# Altium PCB couple4.PcbDoc
Units mil, origin at the board's own origin, x right, y up, seen from the top; angles counter-clockwise.
Board outline 1090 x 970.6 mil, 2 copper layers (Top Layer, Bottom Layer); 10 components, 56 nets, 30 pads, 122 vias.
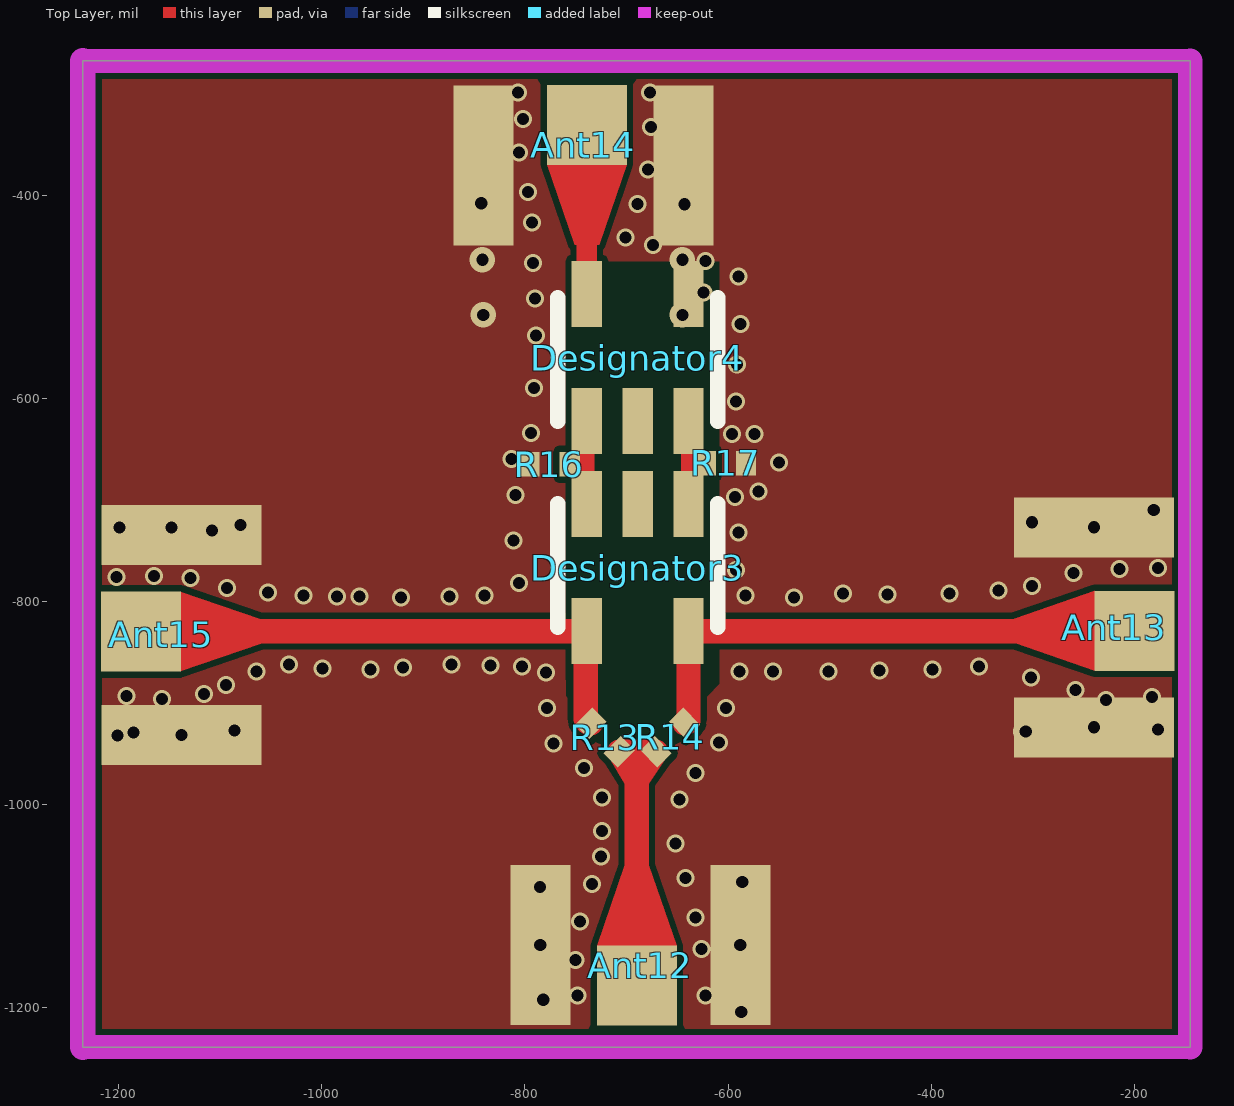
[diagram p0: Top Layer view]
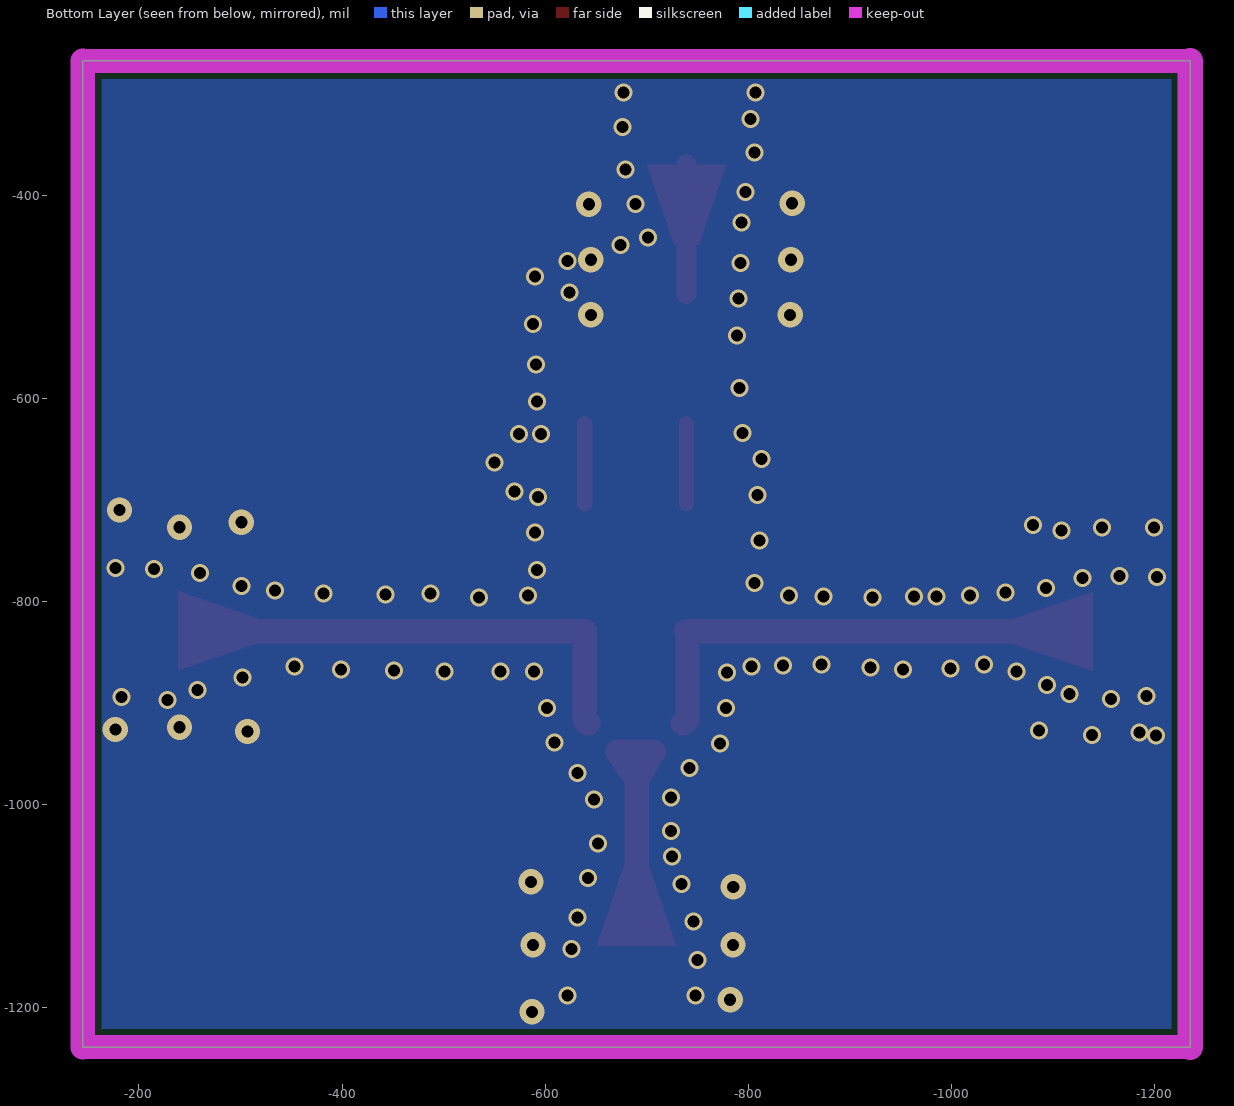
[diagram p1: Bottom Layer view, seen from below]

## Layer stack, top to bottom
Top Solder: solder mask 0.4, Solder Resist, Dk 3.5
Top Layer: signal copper 1.4
Dielectric 1: dielectric 12.6, FR-4, Dk 4.8
Bottom Layer: signal copper 1.4
Bottom Solder: solder mask 0.4, Solder Resist, Dk 3.5

## Board outline
-1235,-1238.6 -1235,-268 -145,-268 -145,-1238.6

## Design rules (kind name [scope] priority, off if disabled: settings)
Clearance [All] p1: gap=6 ignorepadtopadclearanceinfootprint=FALSE
DiffPairsRouting [All] p1: maxlimit=10 minlimit=10 mostfreqgap=10 toplayer_minwidth=15 toplayer_maxwidth=15 toplayer_prefwidth=15 bottomlayer_minwidth=15 bottomlayer_maxwidth=15 bottomlayer_prefwidth=15 maxuncoupledlength=500
MinimumSolderMaskSliver [All] p1 off: minsoldermaskwidth=10
PlaneConnect [All] p1: planeconnectstyle=Direct reliefexpansion=20 reliefentries=4 reliefconductorwidth=10 reliefairgap=10
PolygonConnect [All] p1: connectstyle=Direct reliefconductorwidth=10 reliefentries=4 polygonreliefangle="90 Angle" airgapwidth=10
RoutingVias [All] p1: holewidth=11.81 width=19.68 viastyle="Through Hole" minholewidth=11.81 minwidth=19.68 maxholewidth=28 maxwidth=50
SilkToBoardRegionClearance [All] p1 off:
SilkToSilkClearance [All] p1 off: silktosilkclearance=10
SilkToSolderMaskClearance [IsPad] p1 off: minsilkscreentomaskgap=10 clearancetoexposedcopper=TRUE
SolderMaskExpansion [All] p1: expansion=4
Width [All] p1: maxlimit=30 minlimit=6 preferedwidth=10
24 further rules are at their usual default settings.

## Classes and differential pairs
component class LNA: FB3 U6
component class power&usb: C41 U7
differential pair M1_USB: +M1_USB_P -M1_USB_N
differential pair M2_USB: +M2_USB_P -M2_USB_N

## Components (designator, comment, footprint, x,y, rotation, side; value= is the part's Value field where it differs from the comment)
Ant12 "Antenna" SMA-2 -689.85,-1178 r0 top (schematic designator Ant11)
Ant13 "Antenna" SMA-2 -200,-828.85 r90 top (schematic designator Ant11)
Ant14 "Antenna" SMA-2 -739,-331 r180 top (schematic designator Ant11)
Ant15 "Antenna" SMA-2 -1178,-829.54 r270 top (schematic designator Ant11)
Designator3 "Comment" TC1-1T+ -689,-766.6 r180 top
Designator4 "Comment" TC1-1T+ -689,-560 r0 top
R13 "4.7k" 0402 -721,-934 r135 top value=0Ohm (schematic designator R9)
R14 "4.7k" 0402 -657,-934 r45 top value=0Ohm (schematic designator R9)
R16 "4.7k" 0402 -776,-665 r0 top value=0Ohm (schematic designator R9)
R17 "4.7k" 0402 -602,-664 r180 top value=0Ohm (schematic designator R9)

## Footprints (in the part's own frame and the unit in brackets; to place one, negate y for a bottom-side part, rotate by r counter-clockwise, add the part's x,y. Pads: shape width x height; smd on the part's side, far side on the other; paste and mask are expansions set on the pad)
0402 [mil] "0402-RES"
  rect 20x24 smd: 1(-19.69,0) 2(20,0)
SMA-2 [mm]
  rect 2x2 smd: 1(0,0)
  rect 1.5x4 smd: GND(-2.413,1.016) GND(2.587,1.016)
  Top Layer region: -0.994,0.99 0.994,0.99 0.305,3 -0.305,3
TC1-1T+ [mm]
  rect 0.76x1.65 smd: 1(-1.27,-1.59) 2(0,-1.59) 3(1.27,-1.59) 4(1.27,1.59) 5(-1.27,1.59)
  silkscreen extent -2,-1.6 2,1.5

## Part data
R13 R14 R16 R17: library part Res2, "Resistor", LatestRevisionDate=17-Jul-2002, LatestRevisionNote="Re-released for DXP Platform.", PackageDescription="Axial Device, Thru-Hole; 2 Leads; 0.4 in Pin Spacing", PackageReference=AXIAL-0.4, Published=8-Jun-2000, Publisher="Altium Limited"

## Via types
v1: diameter 17.72, hole 11.81, Top Layer to Bottom Layer, 104 vias
v2: diameter 25, hole 12, Top Layer to Bottom Layer, tented both sides, 18 vias

## Nets (pads, with @x,y where several pads share a name; then routed paths per layer and width w, separated by ;. In a path a pad name is that pad's centre, name@x,y a point inside that pad or via, vN(x,y) a via of type N, cw(c..) or ccw(c..) an arc to the next point about the centre after c; other vN are vias at no path point)
3.3: 
3.3-MT7601: 
3.3LNA1: 
3.3LNA2: 
5V: 
GND: Ant12.GND Ant13.GND Ant14.GND Ant15.GND Designator4.4 R16.1 R17.1
  other v1: -748,-1188 -622,-1188 -750,-1153 -626,-1142 -746,-1115 -632,-1111 -734,-1078 -642,-1072 -725,-1051 -652,-1038 -724,-1026 -648,-995 -724,-993 -632,-969 -742,-964 -772,-940 -609,-939 -1201,-932 -1138,-931.39 -1185,-929 -1086,-927 -778,-905 -602,-905 -228,-897 -1157,-896 -183,-894 -1192,-893 -1116,-891 -258,-887 -1094,-882 -302,-875 -779,-870 -1064,-869 -589,-869 -556,-869 -501,-869 -451,-868 -952,-867 -399,-867 -999,-866 -920,-865 -803,-864 -353,-864 -834,-863 -1032,-862 -872,-862 -922,-796 -535,-796 -985,-795 -963,-795 -874,-795 -1018,-794 -840,-794 -583,-794 -443,-793 -487,-792 -382,-792 -1053,-791 -334,-789 -1093,-787 -301,-785 -806,-782 -1129,-777 -1202,-776 -1165,-775 -260,-772 -592,-769 -215,-768 -177,-767 -811,-740 -590,-732 -1108,-730 -1199,-727 -1148,-727 -1080,-725 -593,-697 -809,-695 -570,-692 -550,-663 -813,-660 -596,-635 -574,-635 -794,-634 -592,-603 -791,-590 -591,-567 -789,-538 -588,-527 -790,-502 -624,-496 -590,-480 -792,-467 -622,-465 -674,-449 -701,-442 -793,-427 -689,-409 -797,-397 -679,-375 -806,-358 -676,-333 -802,-325 -807,-299 -677,-299
  other v2: -587,-1204 -782,-1192 -784.85,-1138 -588,-1138 -785,-1081 -586,-1076 -307,-928 -177,-926 -240,-923.85 -240,-727 -301,-722 -181,-710 -841,-518 -645,-518 -841.85,-463.6 -645,-463.6 -643,-409 -843,-408
M1_USB_N: Designator3.1 Designator4.3 R17.2 | length 79
  Top Layer w15: Designator3.1 Designator4.3@-639,-625
M1_USB_P: Designator3.3 Designator4.1 R16.2 | length 79
  Top Layer w15: Designator3.3 Designator4.1@-739,-625
M2_USB_N: 
M2_USB_P: 
NetAnt1_1: Ant15.1 | length 361.4
  Top Layer w24: -1100.38,-829.2 -739,-829.2
NetAnt2_1: 
NetAnt3_1: 
NetAnt4_1: 
NetAnt5_1: 
NetAnt6_1: 
NetAnt7_1: 
NetAnt8_1: 
NetAnt9_1: 
NetAnt10_1: 
NetAnt11_1: 
NetC2_1: 
NetC2_2: 
NetC3_2: 
NetC7_1: 
NetC8_2: 
NetC13_2: 
NetC14_1: 
NetC15_1: 
NetC16_2: 
NetC17_1: 
NetC18_2: 
NetC19_2: 
NetC20_1: 
NetC25_1: 
NetC26_1: 
NetC27_2: 
NetC28_1: 
NetC33_1: 
NetC34_1: 
NetC34_2: 
NetC35_2: 
NetC40_1: 
NetD2_1: 
NetL1_1: 
NetL3_1: 
NetL4_1: 
NetL6_1: 
NetLNA1_1: 
NetLNA2_1: 
NetR9_2: 
NetR13_2: 
NetR18_2: 
NetR19_1: 
NetU6_1: 
VSYS: 
pads on no net: Ant12.1 Ant13.1 Ant14.1 Designator3.2 Designator3.4 Designator3.5 Designator4.2 Designator4.5 R13.1 R13.2 R14.1 R14.2
copper on no net: | length 980.1
  Top Layer w20: -739.01,-497.4 -739.01,-369.98
  Top Layer w24: -739,-829.2 ccw(c-739,-830.2) -740,-830.2 -740,-915 ccw(c-735.14,-915) -735.14,-919.86 ; -690,-1122 -690,-986.86 -690,-947.92 ; -642.86,-919.86 ccw(c-642.86,-916) -639,-916 -639,-829.2 -277.62,-829.2 ccw(c-277.62,-794.38) -253,-819 ; -707.08,-947.92 -690,-976 -670.92,-947.92 -707.08,-947.92

## Polygon pours and split planes (outlines as drawn)
GND on Top Layer "Top Layer-No Net" (solid, remove dead copper, pour order 12): -1235,-268 -145,-268 -145,-1238.6 -1235,-1238.6
GND on Top Layer "Top Layer-No Net" (solid, remove dead copper, shelved, pour order 10): -2787,497.14 1603,617.14 1493,-1412.86 -2917,-1412.86
GND on Bottom Layer "Top Layer-No Net" (solid, remove dead copper, pour order 16): -1235,-268 -145,-268 -145,-1238.6 -1235,-1238.6

## Keep-outs
Keep-Out Layer:
  the board outline again, w25

## Other copper
Top Layer:
  pour cut-out: -760.45,-464.92 -608,-464.92 -608,-881 -690,-963 -760,-893 -760,-892

## Silkscreen, mask and mechanical layers (free items; w line width, h text height)
Bottom Solder:
  rectangle: -886,-427 -595,-286
  rectangle: -1216,-974 -1060,-684
  rectangle: -316,-965 -163,-672